# EAGLE board SOP20 (EAGLE 6.4)
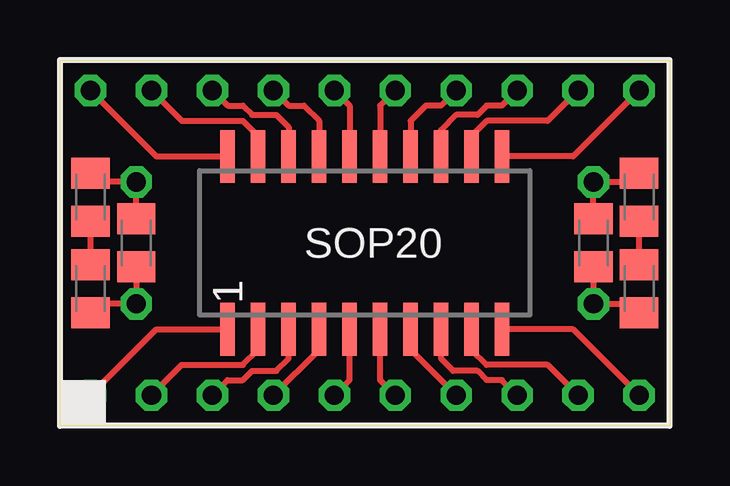
[diagram p0: board, top side]
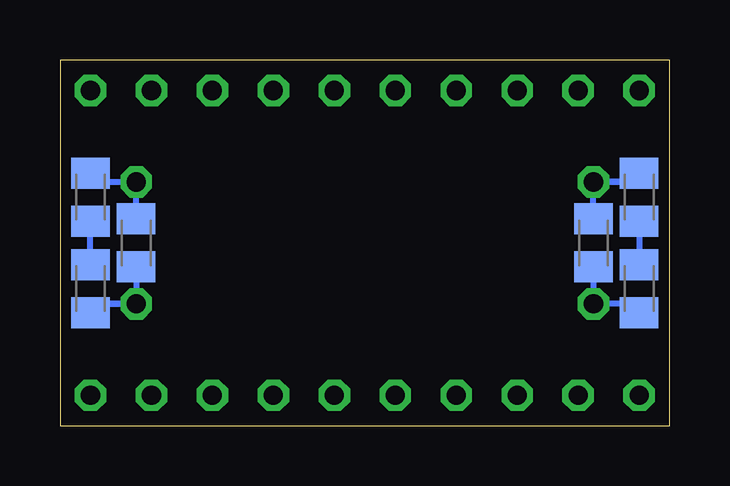
[diagram p1: board, bottom side, seen from below]

Size 25.4 x 15.24 mm. Coordinates in mm from the lower left corner, seen from the top.
Outline: 0,15.24 25.4,15.24 25.4,0 0,0 0,15.24
Copper layers (1*16): Top 0.035mm / dielectric 1.5mm / Bottom 0.035mm
Design rules "default": minimum track width 10mil, minimum drill 0.6mm, track to track 8mil, track to pad 8mil, pad to pad 8mil, via to via 8mil, smd to smd 8mil, copper to edge 40mil, drill to drill 8mil, minimum pad ring 10mil, minimum via ring 8mil, stop-mask expansion 4mil, vias tented up to drill 0mil, thermal gap 10mil

## Footprints (pad centres in the part's own frame; a part is rotated, then mirrored left to right if it is on the bottom)
1 = drill 0.8 octagon: P$1 0,0
SOP20 = smd 0.6 x 2.2: 1 -5.715,-3.6; 2 -4.445,-3.6; 3 -3.175,-3.6; 4 -1.905,-3.6; 5 -0.635,-3.6; 6 0.635,-3.6; 7 1.905,-3.6; 8 3.175,-3.6; 9 4.445,-3.6; 10 5.715,-3.6; 11 5.715,3.6; 12 4.445,3.6; 13 3.175,3.6; 14 1.905,3.6; 15 0.635,3.6; 16 -0.635,3.6; 17 -1.905,3.6; 18 -3.175,3.6; 19 -4.445,3.6; 20 -5.715,3.6
C0805K = smd 1.3 x 1.6: 1 -1,0; 2 1,0

## Placement (x,y rotation side)
E$63  [1]  11.43,13.97 0 top
E$678  [SOP20]  12.7,7.62 0 top
E$679  [1]  1.27,1.27 0 top
E$680  [1]  3.81,1.27 0 top
E$681  [1]  6.35,1.27 0 top
E$682  [1]  8.89,1.27 0 top
E$683  [1]  16.51,1.27 0 top
E$684  [1]  19.05,1.27 0 top
E$685  [1]  21.59,1.27 0 top
E$686  [1]  1.27,13.97 0 top
E$687  [1]  3.81,13.97 0 top
E$688  [1]  6.35,13.97 0 top
E$689  [1]  8.89,13.97 0 top
E$690  [1]  16.51,13.97 0 top
E$691  [1]  19.05,13.97 0 top
E$692  [1]  21.59,13.97 0 top
E$693  [1]  24.13,13.97 0 top
E$694  [1]  24.13,1.27 0 top
E$695  [C0805K]  3.17,7.62 270 top
E$696  [1]  3.17,5.08 180 top
E$697  [1]  3.17,10.16 180 top
E$698  [C0805K]  1.27,5.71 270 top
E$699  [C0805K]  1.27,9.53 270 top
E$700  [C0805K]  1.27,5.71 270 bottom
E$701  [C0805K]  1.27,9.53 270 bottom
E$702  [C0805K]  3.17,7.62 270 bottom
E$703  [C0805K]  22.23,7.62 90 top
E$704  [1]  22.23,10.16 0 top
E$705  [1]  22.23,5.08 0 top
E$706  [C0805K]  24.13,9.53 90 top
E$707  [C0805K]  24.13,5.71 90 top
E$708  [C0805K]  24.13,9.53 90 bottom
E$709  [C0805K]  24.13,5.71 90 bottom
E$710  [C0805K]  22.23,7.62 90 bottom
E$711  [1]  13.97,13.97 0 top
E$712  [1]  11.43,1.27 0 top
E$713  [1]  13.97,1.27 0 top

## Library data of the parts
E$63 E$679-E$694 E$696 E$697 E$704 E$705 E$711-E$713 = drill
E$678 E$695 E$698-E$703 E$706-E$710 = ref-packages

## Nets
S$251: E$678.1 E$679.P$1
S$252: E$678.2 E$680.P$1
S$253: E$678.3 E$681.P$1
S$254: E$678.4 E$682.P$1
S$287: E$678.7 E$683.P$1
S$288: E$678.8 E$684.P$1
S$289: E$678.9 E$685.P$1
S$290: E$678.20 E$686.P$1
S$340: E$678.19 E$687.P$1
S$341: E$678.18 E$688.P$1
S$342: E$678.17 E$689.P$1
S$343: E$678.14 E$690.P$1
S$344: E$678.13 E$691.P$1
S$345: E$678.12 E$692.P$1
S$346: E$678.11 E$693.P$1
S$347: E$678.10 E$694.P$1
S$348: E$695.1 E$697.P$1 E$699.1 E$701.1 E$702.1
S$349: E$698.1 E$699.2
S$350: E$695.2 E$696.P$1 E$698.2 E$700.2 E$702.2
S$351: E$700.1 E$701.2
S$352: E$703.1 E$705.P$1 E$707.1 E$709.1 E$710.1
S$353: E$706.1 E$707.2
S$354: E$703.2 E$704.P$1 E$706.2 E$708.2 E$710.2
S$355: E$708.1 E$709.2
S$356: E$63.P$1 E$678.16
S$357: E$678.15 E$711.P$1
S$358: E$678.5 E$712.P$1
S$359: E$678.6 E$713.P$1

## Tracks (layer width: path | path; a pad name or v marks a point on that pad's centre or on a via)
S$251
  Top 0.254: E$679.P$1 4.02,4.02 E$678.1
S$252
  Top 0.254: E$680.P$1 5.08,2.54 7.62,2.54 8.26,3.17 E$678.2
S$253
  Top 0.254: E$681.P$1 6.99,1.91 7.62,1.91 8,2.29 9.02,2.29 9.53,2.79 E$678.3 9.53,4.45
S$254
  Top 0.254: E$682.P$1 10.79,3.17 E$678.4
S$287
  Top 0.254: E$683.P$1 14.61,3.17 E$678.7
S$288
  Top 0.254: E$684.P$1 18.41,1.91 17.78,1.91 17.4,2.29 16.38,2.29 15.88,2.79 E$678.8
S$289
  Top 0.254: E$685.P$1 20.32,2.54 17.78,2.54 17.14,3.17 E$678.9
S$290
  Top 0.254: E$686.P$1 4.02,11.22 E$678.20
S$340
  Top 0.254: E$687.P$1 5.08,12.7 7.62,12.7 8.26,12.06 E$678.19
S$341
  Top 0.254: E$688.P$1 6.99,13.34 7.62,13.34 8,12.95 9.02,12.95 9.53,12.45 E$678.18
S$342
  Top 0.254: E$689.P$1 9.53,13.34 10.16,13.34 10.79,12.7 E$678.17
S$343
  Top 0.254: E$690.P$1 15.88,13.34 15.24,13.34 14.61,12.7 E$678.14
S$344
  Top 0.254: E$691.P$1 18.41,13.34 17.78,13.34 17.4,12.95 16.51,12.95 15.88,12.32 E$678.13
S$345
  Top 0.254: E$692.P$1 20.32,12.7 17.78,12.7 17.14,12.06 E$678.12
S$346
  Top 0.254: E$693.P$1 21.38,11.22 E$678.11
S$347
  Top 0.254: E$694.P$1 21.38,4.02 E$678.10
S$348
  Top 0.254: E$702.1 E$697.P$1 1.64,10.16 E$701.1
  Bottom 0.254: E$702.1 E$697.P$1 | E$697.P$1 1.64,10.16 E$701.1 1,10.53 0.64,10.16 E$697.P$1
S$349
  Top 0.254: E$699.2 E$698.1
S$350
  Top 0.254: E$698.2 1.27,5.08 E$696.P$1 E$695.2
  Bottom 0.254: E$695.2 E$696.P$1 1.64,5.08 E$698.2
S$351
  Bottom 0.254: E$701.2 E$700.1
S$352
  Top 0.254: E$710.1 E$705.P$1 23.77,5.08 E$709.1
  Bottom 0.254: E$710.1 E$705.P$1 | E$705.P$1 23.77,5.08 E$709.1 24.4,4.71 24.77,5.08 E$705.P$1
S$353
  Top 0.254: E$707.2 E$706.1
S$354
  Top 0.254: E$706.2 24.13,10.16 E$704.P$1 E$703.2
  Bottom 0.254: E$703.2 E$704.P$1 23.77,10.16 E$706.2
S$355
  Bottom 0.254: E$709.2 E$708.1
S$356
  Top 0.254: E$63.P$1 12.06,13.34 E$678.16
S$357
  Top 0.254: E$711.P$1 13.34,13.34 E$678.15
S$358
  Top 0.254: E$712.P$1 12.06,1.91 E$678.5
S$359
  Top 0.254: E$713.P$1 13.34,1.91 E$678.6

## Text on the board
tPlace: SOP20